# EAGLE board vakuum2 (2) (EAGLE 6.2)
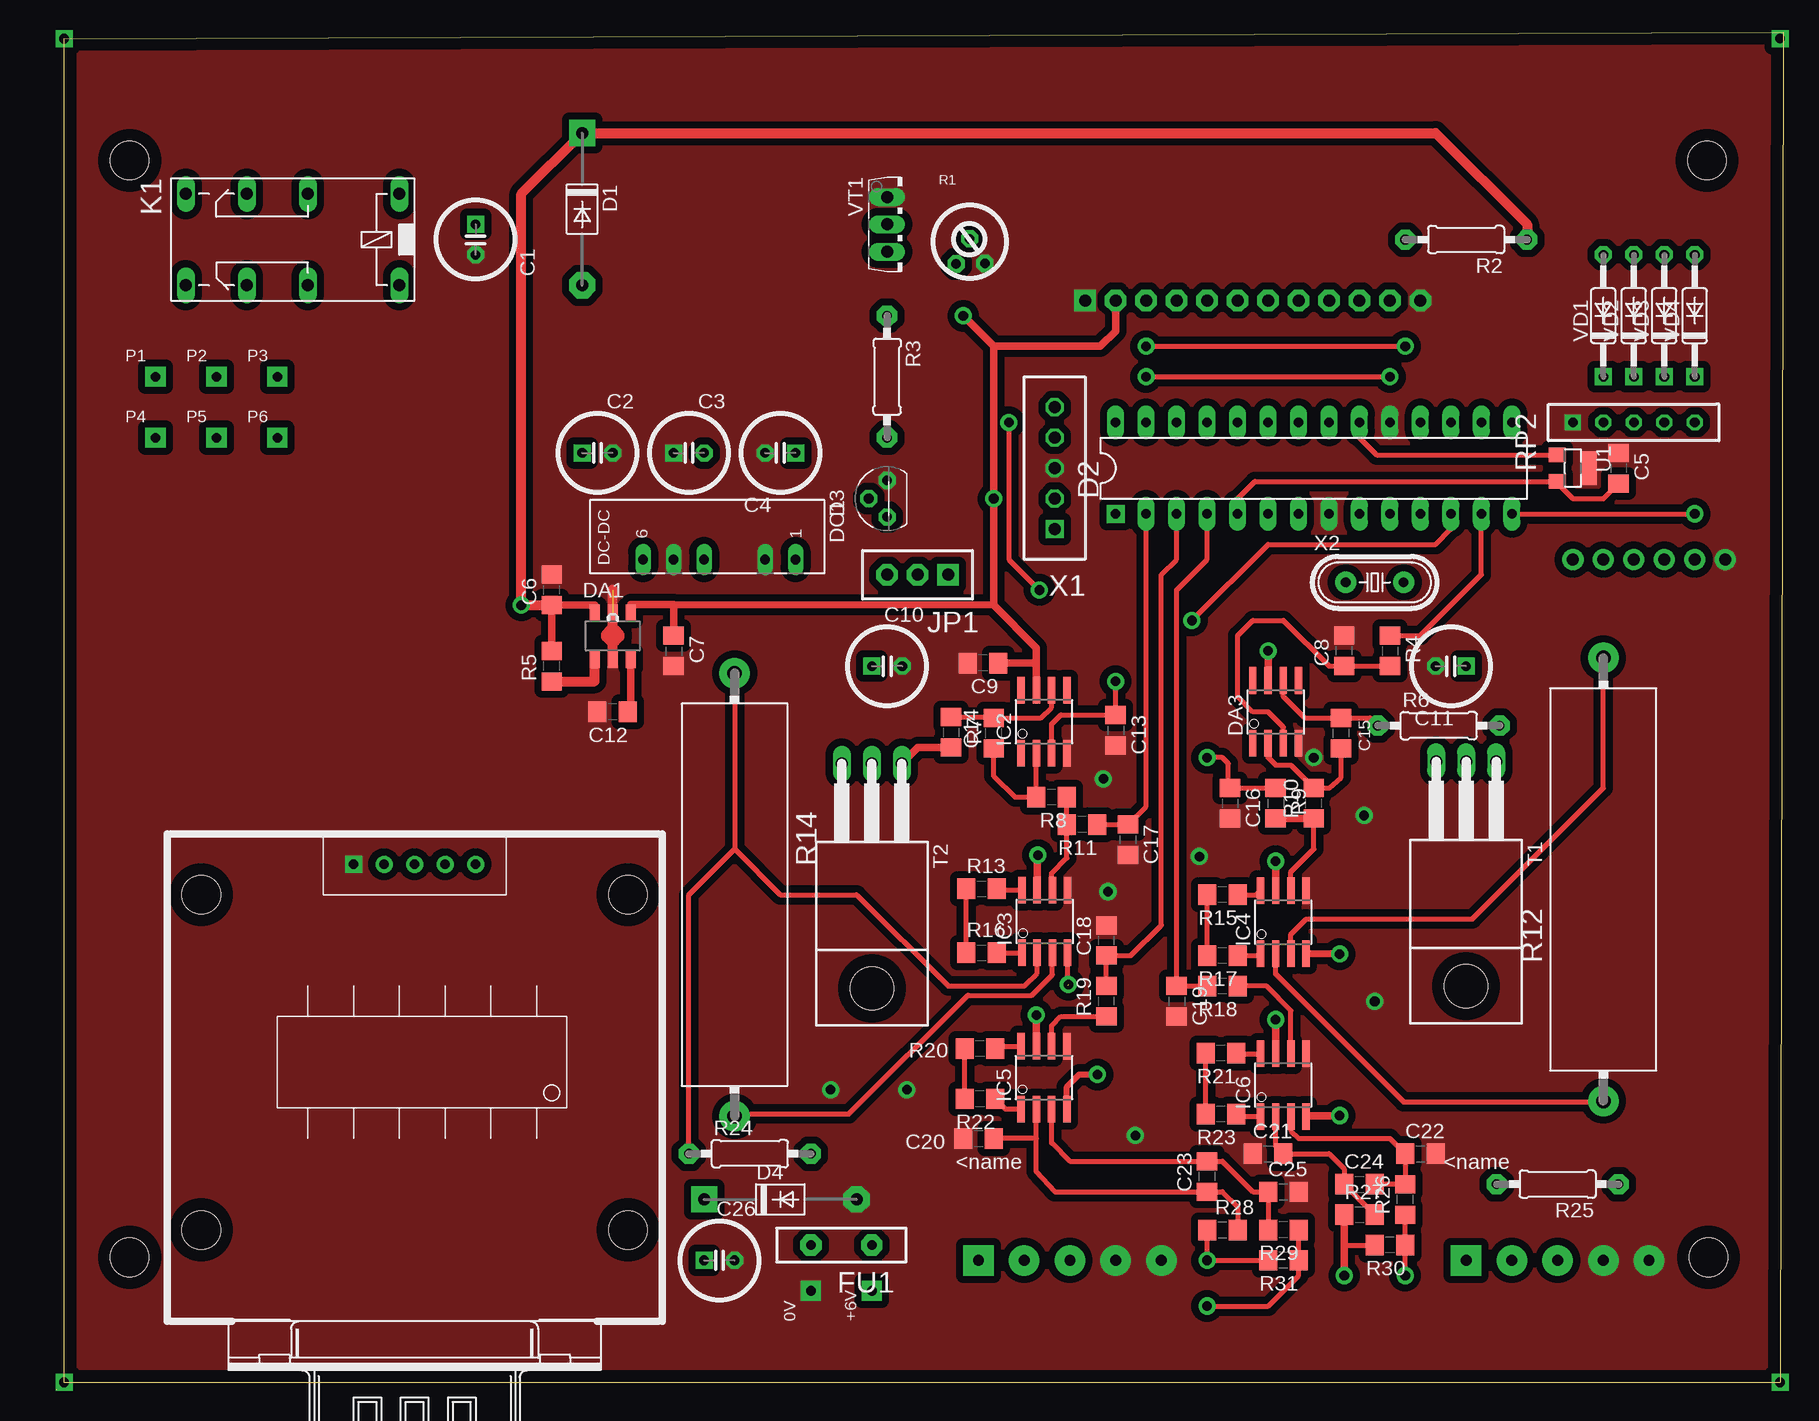
[diagram p0: board, top side]
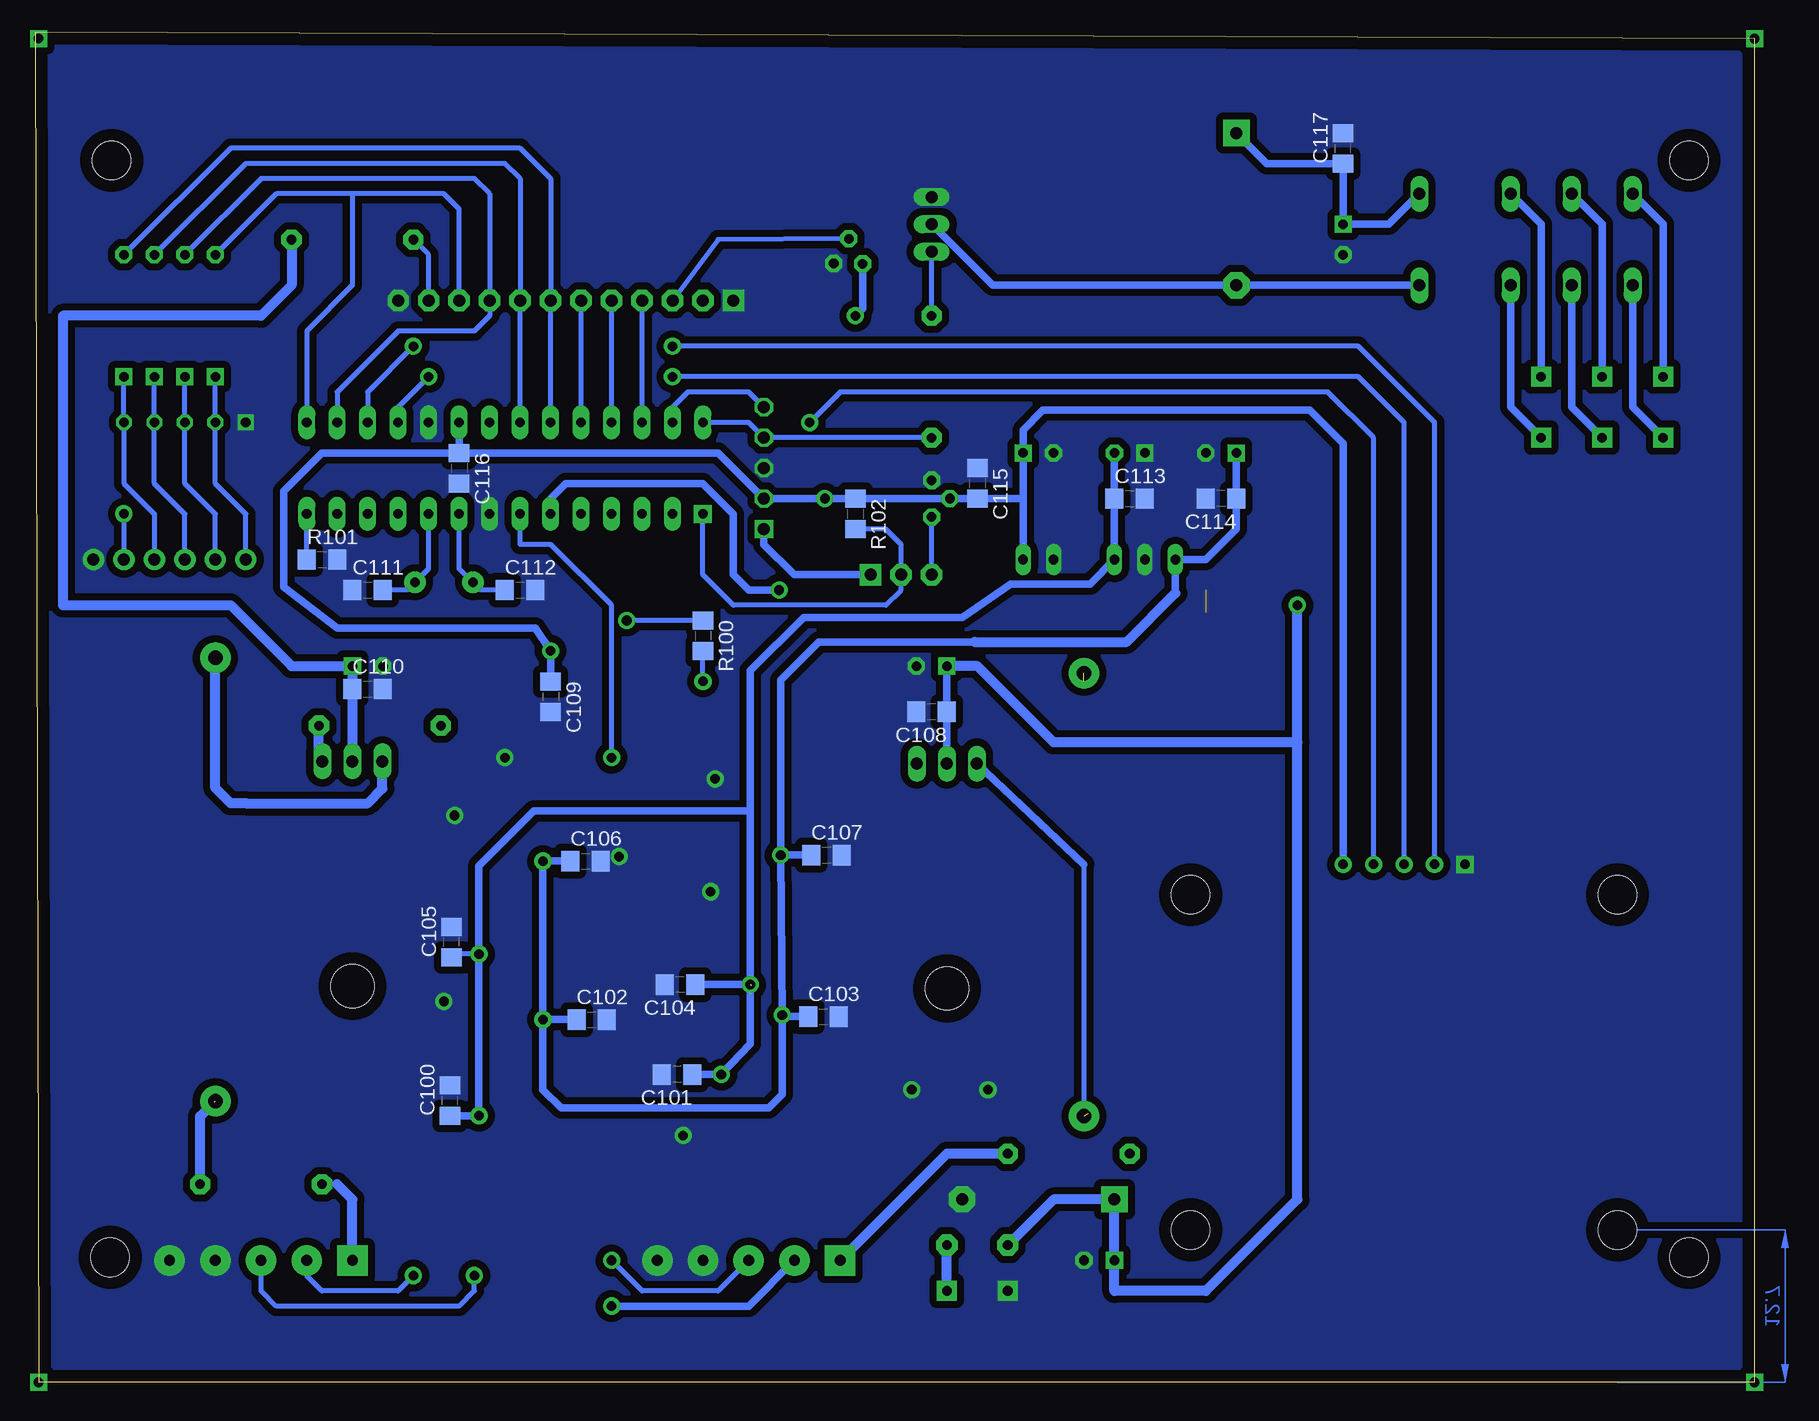
[diagram p1: board, bottom side, seen from below]

Size 143.9 x 113.16 mm. Coordinates in mm from the lower left corner, seen from the top.
Outline: 0.01,0 0,0
Outline: 143.63,0.64 0.63,0.64 0.63,112.64 143.9,113.16 143.64,0.64
Copper layers (1*16): Top 0.035mm / dielectric 1.5mm / Bottom 0.035mm
Design rules: minimum track width 10mil, minimum drill 24mil, track to track 8mil, track to pad 8mil, pad to pad 8mil, via to via 8mil, smd to smd 8mil, copper to edge 40mil, drill to drill 8mil, minimum pad ring 10mil, minimum via ring 8mil, stop-mask expansion 4mil, vias tented up to drill 0mil, thermal gap 10mil
Holes 3.2 mm at 6.09,102.49 137.54,102.49 6.09,11.05 137.67,11.05

## Footprints (pad centres in the part's own frame; a part is rotated, then mirrored left to right if it is on the bottom)
PIN1 = drill 0.8 pad 1.676 square: P$1 0,0
C100MILX6X12 = drill 0.8 pad 1.422 octagon: MINUS 1.27,0 | drill 0.8 pad 1.422 square: PLUS -1.27,0
C0805D = smd 1.5 x 1.7: 1 -1.27,0; 2 1.27,0
DO41-10 = drill 1 pad 2.184 octagon: A 12.7,0 | drill 1 pad 2.184 square: C 0,0
DIL28-3 = drill 0.8 pad 1.5 square: 1 -16.51,-3.81 | drill 0.8 pad 1.4 long: 2 -13.97,-3.81; 3 -11.43,-3.81; 4 -8.89,-3.81; 5 -6.35,-3.81; 6 -3.81,-3.81; 7 -1.27,-3.81; 8 1.27,-3.81; 9 3.81,-3.81; 10 6.35,-3.81; 11 8.89,-3.81; 12 11.43,-3.81; 13 13.97,-3.81; 14 16.51,-3.81; 15 16.51,3.81; 16 13.97,3.81; 17 11.43,3.81; 18 8.89,3.81; 19 6.35,3.81; 20 3.81,3.81; 21 1.27,3.81; 22 -1.27,3.81; 23 -3.81,3.81; 24 -6.35,3.81; 25 -8.89,3.81; 26 -11.43,3.81; 27 -13.97,3.81; 28 -16.51,3.81
TO92-60 = drill 0.8 pad 1.422 octagon: 1 -1.524,0; 2 0,1.524; 3 1.524,0
SOT89-5 = smd 0.8 x 1.4: 1 -1.499,-1.981; 2 0,-1.981; 3 1.499,-1.981; 4 1.499,1.919; 5 -1.499,1.919; 21 0,1.919
SO08 = smd 0.61 x 2.21: 1 -1.905,-2.616; 2 -0.635,-2.616; 3 0.635,-2.616; 4 1.905,-2.616; 5 1.905,2.616; 6 0.635,2.616; 7 -0.635,2.616; 8 -1.905,2.616
NMA = drill 0.8 long: 1 0,6.35; 2 0,3.81; 4 0,-1.27; 5 0,-3.81; 6 0,-6.35
RA90 = drill 0.8 pad 1.778 octagon: P$1 -2.54,0; P$2 2.54,0
PLC-3PIN = drill 1 pad 1.778 square: P$1 0,0 | drill 1 pad 1.778 octagon: P$2 2.54,0; P$3 5.08,0
351 = drill 1 long: 1 -3.81,-3.81; 16 -3.81,3.81; O1 8.89,-3.81; O2 8.89,3.81; P1 3.81,-3.81; P2 3.81,3.81; S1 13.97,-3.81; S2 13.97,3.81
RTRIM3329H = drill 0.8 pad 1.422 octagon: 1 -0.599,-2.024; 2 1.805,-1.985; 3 0.537,0.066
0207/10 = drill 0.8 pad 1.676 octagon: 1 -5.08,0; 2 5.08,0
R0805D = smd 1.5 x 1.7: P$1 -1.27,0; P$2 1.27,0
HPS932 = drill 1.2 pad 2.54: 1 -18.47,0; 2 18.47,0
SIP5 = drill 0.8 square: 1 0,0 | drill 0.8 octagon: 2 0,-2.54; 3 0,-5.08; 4 0,-7.62; 5 0,-10.16
T-30 = drill 1 long: 1 -2.5,-18.735; 2 0,-18.735; 3 2.5,-18.735 | hole 3.6: 0,0
SOT23-W = smd 2.8 x 1.4: GND 0,1.3 | smd 1.2 x 1.4: IN -1.1,-1.3; OUT 1.1,-1.3
DO35-10 = drill 0.8 pad 1.422 octagon: A 5.08,0 | drill 0.8 pad 1.422 square: C -5.08,0
TO126V = drill 1 long: 1 -2.286,0; 2 0,0; 3 2.286,0
WINSTAR16X4_12 = drill 1 pad 1.778 square: P$1 -13.97,1.27 | drill 1 pad 1.778 octagon: P$2 -11.43,1.27; P$3 -8.89,1.27; P$4 -6.35,1.27; P$5 -3.81,1.27; P$6 -1.27,1.27; P$7 1.27,1.27; P$8 3.81,1.27; P$9 6.35,1.27; P$10 8.89,1.27; P$11 11.43,1.27; P$12 13.97,1.27
PLC-5PIN = drill 1 square: P$1 0,5.08 | drill 1 octagon: P$2 0,2.54; P$3 0,0; P$4 0,-2.54; P$5 0,-5.08
HC49/S = drill 0.8 pad 1.778: 1 -2.413,0; 2 2.413,0
KM_RS_232 = drill 0.8 pad 1.422 square: 1 20.32,5.08 | drill 0.8 pad 1.422: 2 20.32,2.54; 3 20.32,0; 4 20.32,-2.54; 5 20.32,-5.08 | hole 3.2: -10.16,17.78; -10.16,-17.78; 17.78,17.78; 17.78,-17.78
MB332-381 = drill 0.9 pad 2.54 square: 1 0,0 | drill 0.9 pad 2.54: 2 3.81,0; 3 7.62,0; 4 11.43,0; 5 15.24,0

## Placement (x,y rotation side)
0V  PIN1  [PIN1]  62.86,8.26 90 top
+6V  PIN1  [PIN1]  67.94,8.26 90 top
C1  [C100MILX6X12]  34.92,95.89 270 top
C2  [C100MILX6X12]  45.08,78.11 0 top
C3  [C100MILX6X12]  52.7,78.11 0 top
C4  [C100MILX6X12]  60.32,78.11 180 top
C5  [C0805D]  130.17,76.84 270 top
C6  0.1  [C0805D]  41.27,66.68 90 top
C7  1u  [C0805D]  51.43,61.59 270 top
C8  10uF  [C0805D]  107.31,61.59 90 top
C9  [C0805D]  77.21,60.58 180 top
C10  [C100MILX6X12]  69.21,60.32 0 top
C11  [C100MILX6X12]  116.2,60.32 180 top
C12  10n  [C0805D]  46.35,56.52 180 top
C13  10uF  [C0805D]  88.26,54.99 270 top
C14  47n  [C0805D]  78.1,54.74 90 top
C15  47n  [C0805D]  107.06,54.74 90 top
C16  10uF  [C0805D]  97.79,48.89 270 top
C17  10uF  [C0805D]  89.28,45.85 270 top
C18  10uF  [C0805D]  87.5,37.46 90 top
C19  10uF  [C0805D]  93.34,32.38 270 top
C20  0.1  [C0805D]  76.83,20.96 0 top
C21  0.1  [C0805D]  100.96,19.69 0 top
C22  0.1  [C0805D]  113.66,19.69 0 top
C23  2.2  [C0805D]  95.88,17.78 90 top
C24  2.2  [C0805D]  108.58,17.15 0 top
C25  0.1  [C0805D]  102.23,16.51 0 top
C26  [C100MILX6X12]  55.24,10.79 0 top
C100  0.1  [C0805D]  109.34,24.13 90 bottom
C101  0.1  [C0805D]  90.42,26.29 180 bottom
C102  0.1  [C0805D]  97.53,30.86 0 bottom
C103  0.1  [C0805D]  78.23,31.12 0 bottom
C104  0.1  [C0805D]  90.17,33.78 180 bottom
C105  0.1  [C0805D]  109.22,37.34 90 bottom
C106  [C0805D]  98.04,44.07 0 bottom
C107  0.1  [C0805D]  77.98,44.58 0 bottom
C108  0.1  [C0805D]  69.21,56.52 180 bottom
C109  0.1  [C0805D]  100.96,57.78 270 bottom
C110  0.1  [C0805D]  116.2,58.42 0 bottom
C111  16pf  [C0805D]  116.2,66.68 0 bottom
C112  16pf  [C0805D]  103.5,66.68 0 bottom
C113  0.1  [C0805D]  52.7,74.3 0 bottom
C114  0.1  [C0805D]  45.08,74.3 180 bottom
C115  0.1  [C0805D]  65.4,75.57 270 bottom
C116  0.1  [C0805D]  108.58,76.84 270 bottom
C117  0.1  [C0805D]  34.92,103.51 90 bottom
D1  1N5061  [DO41-10]  43.81,104.78 270 top
D2  PIC18F2320DIP  [DIL28-3]  104.77,76.84 0 top
D3  DS1811  [TO92-60]  69.21,74.3 90 top
D4  1N5061  [DO41-10]  53.97,15.88 0 top
DA1  NJM2880  [SOT89-5]  46.35,62.86 0 top
DA3  OPA340U  [SO08]  101.6,56.52 0 top
DC1  [NMA]  55.24,69.22 270 top
FU1  RA90  [RA90]  65.4,12.06 180 top
IC2  OPA340U  [SO08]  82.29,55.69 0 top
IC3  INA129U  [SO08]  82.36,39.05 0 top
IC4  INA129U  [SO08]  102.23,38.99 0 top
IC5  INA129U  [SO08]  82.29,26.04 0 top
IC6  INA129U  [SO08]  102.23,25.4 0 top
JP1  JP3PIN  [PLC-3PIN]  74.29,67.95 180 top
K1  351  [351]  24.76,95.89 180 top
P1  PIN1  [PIN1]  8.25,84.45 0 top
P2  PIN1  [PIN1]  13.33,84.45 0 top
P3  PIN1  [PIN1]  18.41,84.45 0 top
P4  PIN1  [PIN1]  8.25,79.38 0 top
P5  PIN1  [PIN1]  13.33,79.38 0 top
P6  PIN1  [PIN1]  18.41,79.38 0 top
R1  15K  [RTRIM3329H]  75.56,95.89 0 top
R2  [0207/10]  117.47,95.89 180 top
R3  1k  [0207/10]  69.21,84.45 270 top
R4  10K  [R0805D]  111.12,61.59 270 top
R5  300k  [R0805D]  41.27,60.32 90 top
R6  1k  [0207/10]  115.19,55.37 0 top
R7  1k  [R0805D]  74.55,54.8 270 top
R8  5.1k  [R0805D]  82.93,49.4 180 top
R9  1K  [R0805D]  101.6,48.89 270 top
R10  5.1k  [R0805D]  104.77,48.89 90 top
R11  1K  [R0805D]  85.47,47.12 180 top
R12  [HPS932]  128.9,42.54 90 top
R13  1K 1%  [R0805D]  77.09,41.78 0 top
R14  [HPS932]  56.51,41.27 270 top
R15  1K 1%  [R0805D]  97.15,41.27 180 top
R16  1K 1%  [R0805D]  77.09,36.45 0 top
R17  1K 1%  [R0805D]  97.15,36.2 180 top
R18  1K  [R0805D]  97.15,33.66 180 top
R19  1K  [R0805D]  87.5,32.38 90 top
R20  30 1%  [R0805D]  76.96,28.45 180 top
R21  30 1%  [R0805D]  97.03,28.07 180 top
R22  100 1%  [R0805D]  76.96,24.26 180 top
R23  100 1%  [R0805D]  97.03,22.99 180 top
R24  12E  [0207/10]  57.78,19.69 0 top
R25  12E  [0207/10]  125.09,17.15 180 top
R26  300  [R0805D]  112.39,15.88 90 top
R27  300  [R0805D]  108.58,14.61 0 top
R28  300  [R0805D]  97.15,13.33 0 top
R29  300  [R0805D]  102.23,13.33 180 top
R30  100k  [R0805D]  111.12,12.06 180 top
R31  100k  [R0805D]  102.23,10.79 180 top
R100  10K  [R0805D]  88.26,62.86 270 bottom
R101  10k  [R0805D]  120.01,69.22 0 bottom
R102  10K  [R0805D]  75.56,73.03 270 bottom
RP2  [SIP5]  126.36,80.65 90 top
T1  KT829  [T-30]  117.47,33.66 180 top
T2  KT829  [T-30]  67.94,33.46 180 top
U1  REF3140  [SOT23-W]  126.36,76.84 270 top
VD1  KD521  [DO35-10]  128.9,89.54 90 top
VD2  KD521  [DO35-10]  131.44,89.54 90 top
VD3  KD521  [DO35-10]  133.98,89.54 90 top
VD4  KD521  [DO35-10]  136.52,89.54 90 top
VT1  KT815  [TO126V]  69.21,97.16 270 top
WINSTAR_DISP1  [WINSTAR16X4_12]  99.69,89.54 0 top
X1  PIC_ISP_CONN  [PLC-5PIN]  83.18,76.84 180 top
X2  10 Mhz  [HC49/S]  109.85,67.31 0 top
X3  [KM_RS_232]  29.84,23.5 90 top
X4  MB332-381  [MB332-381]  76.83,10.79 0 top
X5  MB332-381  [MB332-381]  117.47,10.79 0 top

## Library data of the parts
0V +6V C1-C26 C100-C117 D1-D4 DA1 FU1 JP1 P1-P6 R2-R11 R13 R15-R31 R100-R102 RP2 VD1-VD4 VT1 X1 X2 = den
DA3 IC2 = burr-brown; MPN: OPA340UA; OC_FARNELL: 1106196; OC_NEWARK: 24M5449
DC1 = dc-dc-converter; MF: C & D TECHNOLOGIES, INC; MPN: NMA0515SC; OC_FARNELL: 1021434; OC_NEWARK: 61K3064
IC3-IC6 = burr-brown; MF: TEXAS INSTRUMENTS; MPN: INA129U; OC_FARNELL: 1212415; OC_NEWARK: 35C1732
K1 = relay; OC_FARNELL: unknown; OC_NEWARK: unknown
R1 WINSTAR_DISP1 = Dmitry
R12 R14 = resistor-power; OC_FARNELL: unknown; OC_NEWARK: unknown
T1 T2 = transistor
U1 = ref
X3 = Dmitry (2)
X4 X5 = Klem-vint

## Nets
0V: 0V.P$1 C1.MINUS C2.MINUS C3.PLUS C4.MINUS C5.1 C6.2 C7.2 C8.2 C9.2 C10.MINUS C11.MINUS C12.2 C13.2 C16.2 C17.2 C18.2 C19.2 C20.1 C21.1 C22.2 C25.2 C26.MINUS C100.2 C101.2 C102.2 C103.2 C104.2 C105.2 C106.2 C107.2 C108.2 C109.2 C110.2 C111.1 C112.2 C113.2 C114.2 C115.1 C116.2 C117.2 D2.8 D2.19 D3.3 D4.A DA1.2 DA1.21 DA3.4 DC1.2 DC1.5 IC2.4 IC3.5 IC4.5 IC5.5 IC6.5 R1.2 R101.P$2 RP2.1 U1.GND VT1.1 WINSTAR_DISP1.P$1 WINSTAR_DISP1.P$12 X1.P$3 X3.1 X4.4 X4.5 X5.4 X5.5
+5V: C4.PLUS C7.1 C9.1 C109.1 C115.2 C116.1 D2.20 D3.2 DA1.4 DA3.7 DC1.1 IC2.7 R1.1 R102.P$1 U1.IN WINSTAR_DISP1.P$2 X1.P$2 X3.5
+6V: C1.PLUS C6.1 C10.PLUS C11.PLUS C26.PLUS C108.1 C110.1 C117.1 D1.C D4.C DA1.5 FU1.P$2 K1.1 R2.1 R5.P$2 T1.2 T2.2
+15V: C2.PLUS C102.1 C103.1 C106.1 C107.1 C114.1 DC1.6 IC3.7 IC4.7 IC5.7 IC6.7
-15V: C3.MINUS C100.1 C101.1 C104.1 C105.1 C113.1 DC1.4 IC3.4 IC4.4 IC5.4 IC6.4
AN0: C17.1 D2.2 R11.P$1
AN1: C18.1 D2.3 R19.P$2
AN2: C19.1 D2.4 R18.P$2
AN4: C16.1 D2.7 R9.P$1
CCP1: D2.13 R4.P$1
CCP2: D2.12 R100.P$1
EN: D2.6 X3.4
MCLR: JP1.P$1 X1.P$1
N$1: IC5.6 R19.P$1
N$2: C112.1 D2.9 X2.1
N$3: C23.2 C25.1 IC5.3 R29.P$2
N$4: C111.2 D2.10 X2.2
N$5: R20.P$2 R22.P$2
N$6: IC5.1 R22.P$1
N$7: D2.1 JP1.P$2 R102.P$2
N$8: C21.2 C24.1 IC6.2 R27.P$2
N$9: IC6.8 R21.P$1
N$10: IC6.1 R23.P$1
N$11: C22.1 C24.2 IC6.3 R26.P$2
N$12: IC4.8 R15.P$1
N$13: IC6.6 R18.P$1
N$14: R15.P$2 R17.P$2
N$15: R13.P$1 R16.P$1
N$16: IC5.8 R20.P$1
N$17: R21.P$2 R23.P$2
N$18: C20.2 C23.1 IC5.2 R28.P$2
N$19: R2.2 WINSTAR_DISP1.P$11
N$20: C15.1 DA3.2 R10.P$2
N$21: +6V.P$1 FU1.P$1
N$22: IC3.6 R8.P$1 R11.P$2
N$23: D3.1 JP1.P$3
N$24: R1.3 WINSTAR_DISP1.P$3
N$29: C14.2 IC2.6 R7.P$1
N$30: C13.1 IC2.3 R100.P$2
N$31: R7.P$2 T2.1
N$32: IC3.8 R13.P$2
N$33: IC3.1 R16.P$2
N$34: IC3.3 R14.2 T2.3
N$35: IC3.2 R14.1 R24.1
N$37: D1.A K1.16 VT1.2
N$38: IC4.6 R9.P$2 R10.P$1
N$39: C14.1 IC2.2 R8.P$2
N$40: K1.S2 P4.P$1
N$41: C15.2 DA3.6 R6.1
N$42: C8.1 DA3.3 R4.P$2
N$43: R6.2 T1.1
N$44: R3.1 VT1.3
N$45: IC4.1 R17.P$1
N$46: IC4.3 R12.2 T1.3
N$47: IC4.2 R12.1 R25.1
N$48: DA1.1 R5.P$1
N$49: C12.1 DA1.3
N$50: K1.O2 P5.P$1
N$51: K1.S1 P1.P$1
N$52: K1.O1 P2.P$1
N$53: K1.P1 P3.P$1
N$54: K1.P2 P6.P$1
PGC: D2.27 X1.P$5
PGD: D2.28 R3.2 X1.P$4
RB0: D2.21
RB1: D2.22 VD3.A WINSTAR_DISP1.P$8
RB2: D2.23 VD4.A WINSTAR_DISP1.P$7
RB3: D2.24 WINSTAR_DISP1.P$6
RB4: D2.25 WINSTAR_DISP1.P$5
RB5: D2.26 WINSTAR_DISP1.P$4
RC3: D2.14 R101.P$1
RC4: D2.15 VD1.A WINSTAR_DISP1.P$10
RC5: D2.16 VD2.A WINSTAR_DISP1.P$9
REF: C5.2 D2.5 U1.OUT
RX: D2.18 X3.3
SENS1.1: R24.2 X4.1
SENS1.2: R29.P$1 R31.P$1 X4.2
SENS1.3: R28.P$1 R31.P$2 X4.3
SENS2.1: R25.2 X5.1
SENS2.2: R26.P$1 R30.P$1 X5.2
SENS2.3: R27.P$1 R30.P$2 X5.3
SW1: RP2.2 VD1.C
SW2: RP2.3 VD2.C
SW3: RP2.4 VD3.C
SW4: RP2.5 VD4.C
TX: D2.17 X3.2

## Tracks (layer width: path | path; a pad name or v marks a point on that pad's centre or on a via)
0V  (via drill 0.8 pad 1.42, 1 pad 1.78)  (1 unrouted)
  Top 0.813: DA1.2 46.35,66.68
  other vias: 95.25,44.45 108.96,47.88 109.85,32.38 87.63,41.53 64.51,25.02 70.86,25.02 89.91,21.21 87.25,50.93 139.06,69.22 104.77,52.7
  pour Bottom (isolate 0.6, no thermals): -0.51,113.03 144.27,113.41 144.27,0.89 -0.26,0.38
  pour Top (isolate 0.6, no thermals): 0.76,112.27 144.52,113.41 144.27,-0.38 1.01,0.38
+5V  (via drill 0.8 pad 1.42)
  Top 0.406: U1.IN 110.02,77.94 108.58,79.38 D2.20
  Top 0.61: 78.1,65.41 v78.1,74.3 78.1,87 | 78.1,65.41 51.43,65.48 | 81.66,60.58 IC2.7 | 81.66,60.58 C9.1 | 51.43,65.48 47.85,65.48 DA1.4 | 51.43,65.48 C7.1 | 78.1,87 v75.56,89.54 | 78.1,87 86.99,87 88.26,88.27 WINSTAR_DISP1.P$2 | 81.66,60.58 81.66,61.85 78.1,65.41 | v100.96,61.59 DA3.7
  Bottom 0.61: X3.5 34.92,78.87 37.72,81.66 59.94,81.66 61.59,80.01 C4.PLUS 61.59,74.3 | C116.1 D2.20 | C116.1 86.99,78.11 X1.P$2 v78.1,74.3 R102.P$1 D3.2 C115.2 61.59,74.3 | C116.1 120.01,78.11 123.19,74.93 123.19,66.93 118.74,63.5 102.23,63.5 v100.96,61.59 C109.1 | 61.59,74.3 DC1.1 | R1.1 74.96,90.13 v75.56,89.54
+6V  (via drill 0.8 pad 1.42)
  Top 0.61: R5.P$2 C6.1 44.85,65.41 DA1.5
  Top 0.813: R2.1 122.55,97.16 114.93,104.78 D1.C 38.73,99.7 v38.73,65.41 C6.1
  Bottom 0.61: T2.2 C108.1 C10.PLUS | K1.1 31.11,97.16 C1.PLUS C117.1 41.27,102.23 D1.C
  Bottom 0.813: C10.PLUS 65.4,60.32 59.05,53.98 38.73,53.98 | 38.73,53.98 v38.73,65.41 | R2.1 122.55,92.08 125.09,89.54 141.6,89.54 141.6,65.41 127.63,65.41 122.55,60.32 C11.PLUS C110.1 T1.2 | FU1.P$2 59.05,15.88 D4.C C26.PLUS 53.97,8.26 46.35,8.26 38.73,15.88 38.73,53.98
+15V  (via drill 0.8 pad 1.42)
  Top 0.61: v81.66,31.24 IC5.7 | v101.6,44.07 IC4.7 | v101.6,30.86 IC6.7 | IC3.7 81.72,44.58 v81.79,44.58
  Bottom 0.61: 81.66,31.12 v81.66,31.24 81.66,24.64 82.8,23.5 100.07,23.5 101.6,25.02 v101.6,30.86 | 81.66,31.12 v81.79,44.58 | v81.79,44.58 81.79,59.18 78.61,62.36 65.66,62.36 | v101.6,30.86 v101.6,44.07 C106.1 | 81.66,31.12 C103.1 | v81.79,44.58 C107.1 | C2.PLUS C114.1 43.81,71.76 46.35,69.22 DC1.6 48.89,66.42 | v101.6,30.86 C102.1
  Bottom 0.813: 65.66,62.36 52.96,62.36 48.89,66.42
-15V  (via drill 0.8 pad 1.42)  (1 unrouted)
  Top 0.406: 84.26,33.72 IC3.4
  Top 0.508: IC5.4 84.2,25.27 85.21,26.29 v86.74,26.29
  Top 0.61: v106.93,36.32 IC4.4 | IC6.4 104.14,22.86 v106.93,22.86
  Bottom 0.406: v106.93,36.32 109.22,36.32 C105.1 | v106.93,22.86 106.93,22.8
  Bottom 0.61: 84.33,48.26 84.33,59.94 79.88,64.39 66.67,64.39 62.61,67.18 56.01,67.18 DC1.4 C113.1 C3.MINUS | 84.33,48.26 102.36,48.26 106.93,43.69 v106.93,36.32 v106.93,22.86 C100.1 | C101.1 v86.74,26.29 84.33,28.83 v84.33,33.78 | v84.33,33.78 C104.1 | v84.33,33.78 84.33,48.26
AN0
  Top 0.406: C17.1 R11.P$1 C17.1 | D2.2 90.8,48.64 C17.1
AN1
  Top 0.406: R19.P$2 C18.1 89.53,36.2 92.07,38.73 92.07,67.95 93.34,69.22 D2.3
AN2
  Top 0.406: D2.4 95.88,69.22 93.34,66.68 C19.1 R18.P$2
AN4  (via drill 0.8 pad 1.42)
  Top 0.406: R9.P$1 C16.1 97.66,50.16 97.66,52.2 97.15,52.7 v95.88,52.7
  Bottom 0.406: D2.7 103.5,70.48 100.96,70.48 95.88,65.41 v95.88,52.7
CCP1
  Top 0.406: D2.13 118.74,67.95 113.66,62.86 R4.P$1
CCP2  (via drill 0.8 pad 1.42)
  Top 0.406: D2.12 116.2,71.76 114.93,70.48 100.96,70.48 v94.61,64.14
  Bottom 0.406: R100.P$1 v94.61,64.14
EN  (via drill 0.8 pad 1.42)
  Top 0.406: v81.91,66.68 79.37,69.22 v79.37,80.65
  Bottom 0.406: X3.4 32.38,79.38 36.19,83.19 76.83,83.19 v79.37,80.65
  Bottom 0.61: D2.6 100.96,74.3 99.69,75.57 88.26,75.57 85.72,73.03 85.72,67.95 84.45,66.68 v81.91,66.68
MCLR
  Bottom 0.61: X1.P$1 83.18,70.48 80.64,67.95 JP1.P$1
N$1
  Top 0.406: IC5.6 82.93,30.35 83.69,31.12 R19.P$1
N$2
  Bottom 0.406: D2.9 108.58,68.45 X2.1 106.8,66.68 C112.1
N$3
  Top 0.406: R29.P$2 C25.1 99.69,16.51 97.15,19.05 C23.2 84.45,19.05 82.93,20.57 IC5.3
N$4
  Bottom 0.406: D2.10 111.12,68.45 X2.2 112.9,66.68 C111.2
N$5
  Top 0.406: R22.P$2 R20.P$2
N$6
  Top 0.406: IC5.1 79.07,23.42 R22.P$1
N$7
  Bottom 0.406: D2.1 88.26,67.95 85.72,65.41 73.02,65.41 71.75,66.68 JP1.P$2 71.75,70.48 73.02,71.76 R102.P$2
N$8
  Top 0.406: R27.P$2 C24.1 107.31,18.42 106.04,19.69 C21.2 101.6,20.32 IC6.2
N$9
  Top 0.406: IC6.8 98.75,28.02 R21.P$1
N$10
  Top 0.406: IC6.1 98.5,22.78 R23.P$1
N$11
  Top 0.406: C24.2 R26.P$2 C22.1 111.12,20.96 103.5,20.96 102.87,21.59 IC6.3
N$12
  Top 0.406: R15.P$1 100,41.27 IC4.8
N$13
  Top 0.254: 98.23,33.66 R18.P$1
  Top 0.406: IC6.6 102.87,31.62 100.84,33.66 98.23,33.66
N$14
  Top 0.406: R17.P$2 R15.P$2
N$15
  Top 0.406: R16.P$1 R13.P$1
N$16
  Top 0.406: IC5.8 78.94,28.65 R20.P$1
N$17
  Top 0.406: R23.P$2 R21.P$2
N$18
  Top 0.406: 81.66,20.96 81.66,18.16 83.18,16.51 C23.1 97.15,16.51 98.42,15.24 R28.P$2 | 81.66,20.96 IC5.2 | 81.66,20.96 C20.2
N$19
  Bottom 0.406: R2.2 111.12,94.62 WINSTAR_DISP1.P$11
N$20
  Top 0.406: C15.1 107.06,51.05 106.04,50.16 R10.P$2 102.87,52.07 101.6,52.07 100.96,52.7 DA3.2
N$21
  Bottom 0.813: +6V.P$1 FU1.P$1
N$22
  Top 0.406: R8.P$1 R11.P$2 84.2,44.32 82.93,43.05 82.93,41.67 IC3.6
N$23
  Bottom 0.406: JP1.P$3 D3.1
N$24
  Bottom 0.406: R1.3 86.99,95.89 WINSTAR_DISP1.P$3
N$25  (via drill 0.8 pad 1.42)
  other vias: 0.63,112.64
N$26  (via drill 0.8 pad 1.42)
  other vias: 0.63,0.64
N$27  (via drill 0.8 pad 1.42)
  other vias: 143.64,0.64
N$28  (via drill 0.8 pad 1.42)
  other vias: 143.64,112.65
N$29
  Top 0.406: R7.P$1 78.1,56.07 C14.2 82.04,56.01 82.93,56.9 IC2.6
N$30  (via drill 0.8 pad 1.42)
  Top 0.406: IC2.3 82.93,55.5 83.69,56.26 C13.1 v88.26,59.05
  Bottom 0.406: v88.26,59.05 R100.P$2
N$31
  Top 0.61: T2.1 71.77,53.53 R7.P$2
N$32
  Top 0.406: IC3.8 78.36,41.67 R13.P$2
N$33
  Top 0.406: IC3.1 R16.P$2
N$34  (1 unrouted)
  Top 0.406: IC3.3 82.99,34.61 81.28,32.89 75.94,32.89 66.04,22.99 56.2,22.99
  Bottom 0.406: 56.51,43.81 R14.2
  Bottom 0.61: 56.51,43.81 T2.3
N$35  (1 unrouted)
  Top 0.406: 56.51,45.09 60.32,41.27 66.67,41.27 74.29,33.66 80.64,33.66 81.72,34.73 IC3.2 | 56.51,59.05 56.51,45.09 | R24.1 52.7,41.27 56.51,45.09
N$37
  Bottom 0.61: VT1.2 64.13,92.08 D1.A K1.16
N$38
  Top 0.406: IC4.6 102.87,43.18 104.77,45.09 R10.P$1
  Top 0.61: R10.P$1 R9.P$2
N$39
  Top 0.406: IC2.2 R8.P$2 79.88,49.4 78.1,51.18 C14.1
N$40
  Bottom 0.61: K1.S2 10.79,81.92 P4.P$1
N$41
  Top 0.406: DA3.6 102.23,57.78 104.01,56.01 C15.2 109.47,56.01 R6.1
N$42
  Top 0.406: R4.P$2 C8.1 106.04,60.32 102.23,64.14 99.69,64.14 98.42,62.86 98.42,57.78 99.69,56.52 100.96,56.52 102.23,55.24 DA3.3
N$43
  Bottom 0.61: T1.1 120.27,52.43
  Bottom 0.813: 120.27,52.43 R6.2
N$44
  Bottom 0.406: R3.1 VT1.3
N$45
  Top 0.406: R17.P$1 100.15,36.2 IC4.1
N$46
  Top 0.406: IC4.3 102.87,37.97 104.14,39.24 117.98,39.24 128.9,50.16 R12.2
  Top 0.61: IC4.3 102.87,36.45
  Bottom 0.813: T1.3 114.97,50.12 116.2,48.89 126.36,48.89 127.63,48.89 128.9,50.16 R12.2
N$47  (1 unrouted)
  Top 0.406: IC4.2 101.6,34.67 112.27,24 128.98,24
  Bottom 0.813: R25.1 130.17,22.81 R12.1
N$48
  Top 0.813: R5.P$1 44.85,59.05 DA1.1
N$49
  Top 0.61: DA1.3 47.85,56.74 C12.1
N$50
  Bottom 0.61: K1.O2 15.87,81.92 P5.P$1
N$51
  Bottom 0.61: K1.S1 8.25,97.16 P1.P$1
N$52
  Bottom 0.61: K1.O1 13.33,97.16 P2.P$1
N$53
  Bottom 0.61: K1.P1 18.41,97.16 P3.P$1
N$54
  Bottom 0.61: K1.P2 20.95,81.92 P6.P$1
PGC
  Bottom 0.406: D2.27 90.8,81.92 89.53,83.19 84.45,83.19 X1.P$5
PGD
  Bottom 0.406: D2.28 84.45,80.65 X1.P$4 R3.2
RB1
  Bottom 0.406: D2.22 WINSTAR_DISP1.P$8 103.5,100.97 104.77,102.23 126.36,102.23 VD3.A
RB2
  Bottom 0.406: D2.23 WINSTAR_DISP1.P$7 100.96,100.97 103.5,103.51 127.63,103.51 VD4.A
RB3
  Bottom 0.406: D2.24 WINSTAR_DISP1.P$6
RB4
  Bottom 0.406: D2.25 WINSTAR_DISP1.P$5
RB5
  Bottom 0.406: D2.26 WINSTAR_DISP1.P$4
RC3  (via drill 0.8 pad 1.42, 1 pad 1.78)
  Top 0.406: D2.14 v136.52,73.03
  Bottom 0.406: R101.P$1 D2.14 | v136.52,73.03 v136.52,69.22
RC4
  Bottom 0.406: VD1.A 123.82,99.7 117.47,99.7 | 117.47,99.7 109.85,99.7 108.58,98.43 WINSTAR_DISP1.P$10 | D2.15 121.28,88.27 117.47,92.08 117.47,99.7
RC5
  Bottom 0.406: D2.16 118.74,83.19 113.66,88.27 107.31,88.27 106.04,89.54 WINSTAR_DISP1.P$9 106.04,99.7 107.31,100.97 125.09,100.97 VD2.A
REF
  Top 0.406: D2.5 98.42,74.3 99.86,75.73 U1.OUT 125.09,75.7 125.09,75.57 126.36,74.3 128.9,74.3 C5.2
RX  (via drill 0.8 pad 1.42)
  Top 0.406: v90.8,84.45 v111.12,84.45
  Bottom 0.406: X3.3 29.84,80.65 33.65,84.45 v90.8,84.45 | v111.12,84.45 113.66,81.92 D2.18
SENS1.1
  Bottom 0.813: R24.2 67.94,19.69 X4.1
SENS1.2  (via drill 0.8 pad 1.42)
  Top 0.406: R29.P$1 R31.P$1 103.5,9.53 100.96,6.98 v95.88,6.98
  Bottom 0.61: X4.2 84.45,6.98 v95.88,6.98
SENS1.3  (via drill 0.8 pad 1.42)
  Top 0.406: R28.P$1 v95.88,10.79 R31.P$2
  Bottom 0.406: v95.88,10.79 93.34,8.26 86.99,8.26 X4.3
SENS2.1
  Bottom 0.406: 118.74,17.15 R25.2
  Bottom 0.813: 118.74,17.15 117.47,15.88 X5.1
SENS2.2  (via drill 0.8 pad 1.42)
  Top 0.406: R26.P$1 R30.P$1 v112.39,9.53
  Bottom 0.406: X5.2 121.28,9.53 120.01,8.26 113.66,8.26 v112.39,9.53
SENS2.3  (via drill 0.8 pad 1.42)
  Top 0.406: 107.31,12.06 R30.P$2
  Top 0.61: v107.31,9.53 107.31,12.06 R27.P$1
  Bottom 0.406: X5.3 125.09,8.26 123.82,6.98 108.58,6.98 107.31,8.26 v107.31,9.53
SW1  (via drill 1 pad 1.78)
  Bottom 0.406: v126.36,69.22 126.36,73.03 128.9,75.57 VD1.C RP2.2
SW2  (via drill 1 pad 1.78)
  Bottom 0.406: v128.9,69.22 128.9,73.03 131.44,75.57 RP2.3 VD2.C
SW3  (via drill 1 pad 1.78)
  Bottom 0.406: v131.44,69.22 131.44,73.03 133.98,75.57 RP2.4 VD3.C
SW4  (via drill 1 pad 1.78)
  Bottom 0.406: VD4.C RP2.5 136.52,75.57 133.98,73.03 v133.98,69.22
TX  (via drill 0.8 pad 1.42)
  Top 0.406: v90.8,87 v112.39,87
  Bottom 0.406: D2.17 116.2,83.19 v112.39,87 | v90.8,87 33.65,87 27.3,80.65 X3.2
(copper drawn outside any net)
  shapes: Bottom area x1